# EAGLE board DC30_Cnet_Cow-A-Bunga_SAO Panel (EAGLE 9.6.2)
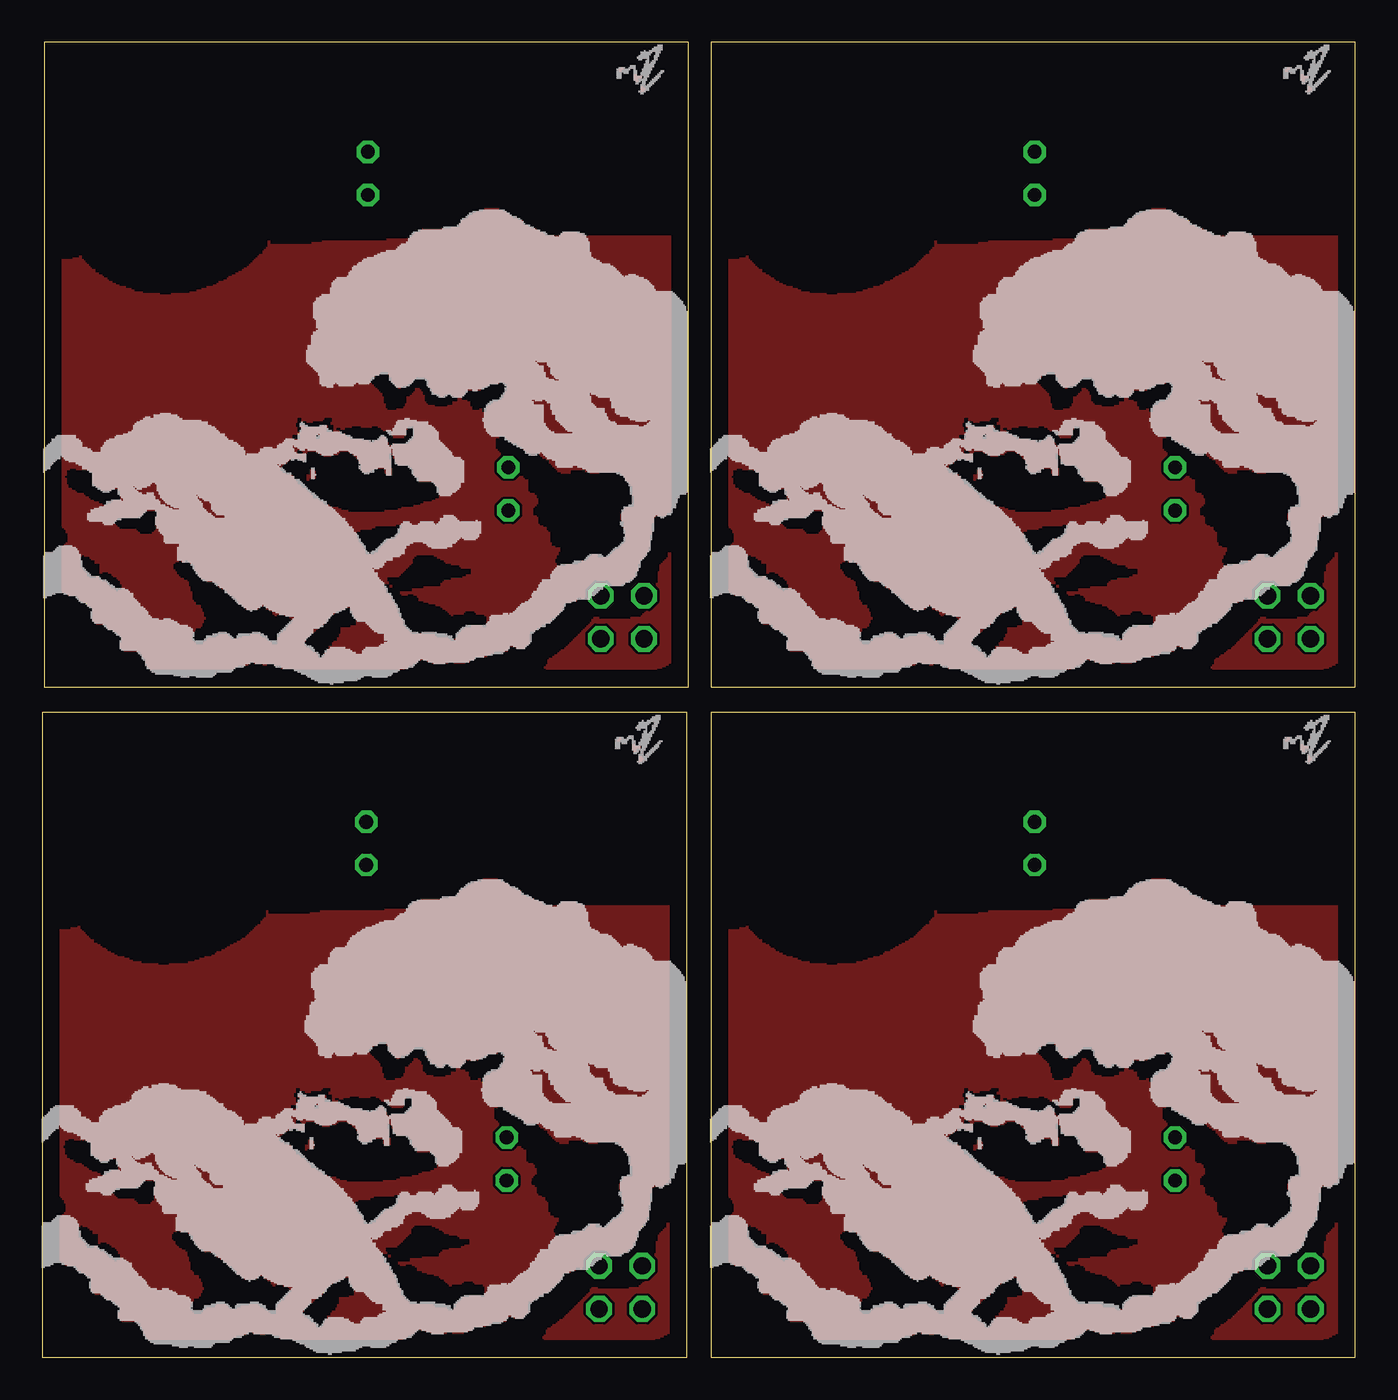
[diagram p0: board, top side]
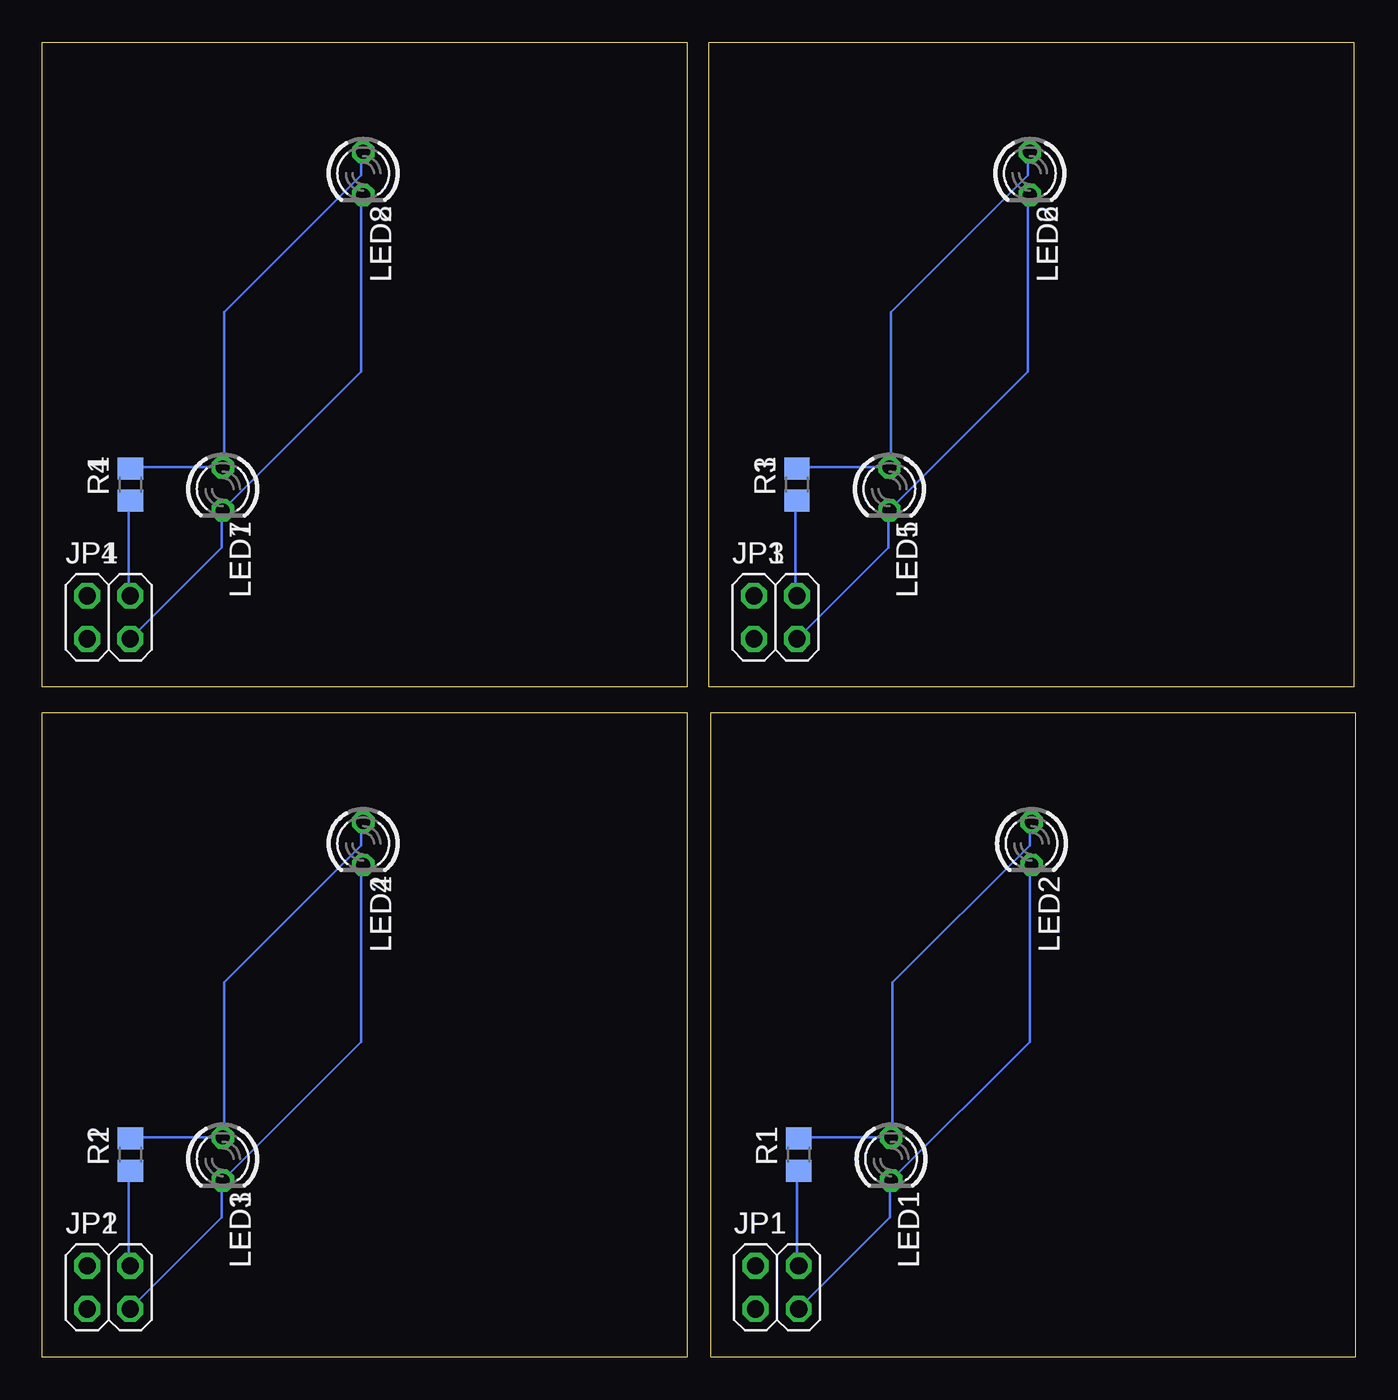
[diagram p1: board, bottom side, seen from below]

Size 77.4 x 77.5 mm. Coordinates in mm from the lower left corner, seen from the top.
Outline: 0,0 38,0 38,38 0,38 0,0
Outline: 39.4,0 77.4,0 77.4,38 39.4,38 39.4,0
Outline: 0.1,39.5 38.1,39.5 38.1,77.5 0.1,77.5 0.1,39.5
Outline: 39.4,39.5 77.4,39.5 77.4,77.5 39.4,77.5 39.4,39.5
Copper layers (1*16): Top 0.035mm / dielectric 1.5mm / Bottom 0.035mm
Design rules "default": minimum track width 6mil, minimum drill 0.35mm, track to track 6mil, track to pad 6mil, pad to pad 6mil, via to via 6mil, smd to smd 6mil, copper to edge 40mil, drill to drill 6mil, minimum pad ring 10mil, minimum via ring 8mil, stop-mask expansion 4mil, vias tented up to drill 0mil, thermal gap 10mil
tRestrict: area 16.5,10.7 to 17.2,10.8; area 16.5,10.8 to 17.5,11; area 16.2,10.9 to 18.6,11; area 16.1,11 to 19.4,11.2; area 15.8,11.2 to 19.8,11.3; area 15.8,11.2 to 17.3,11.3; area 17.6,11.2 to 20.1,11.3; area 15.8,11.3 to 17.2,11.5; area 17.6,11.3 to 20.2,11.5; area 15.7,11.4 to 17.2,11.5; area 17.8,11.4 to 20.6,11.5; area 15.5,11.5 to 17.1,11.7; 5028 more areas
bRestrict: area 16.5,10.7 to 17.2,10.8; area 16.5,10.8 to 17.5,11; area 16.2,10.9 to 18.6,11; area 16.1,11 to 19.4,11.2; area 15.8,11.2 to 19.8,11.3; area 15.8,11.2 to 17.3,11.3; area 17.6,11.2 to 20.1,11.3; area 15.8,11.3 to 17.2,11.5; area 17.6,11.3 to 20.2,11.5; area 15.7,11.4 to 17.2,11.5; area 17.8,11.4 to 20.6,11.5; area 15.5,11.5 to 17.1,11.7; 796 more areas

## Footprints (pad centres in the part's own frame; a part is rotated, then mirrored left to right if it is on the bottom)
2X02 = drill 1.016 octagon: 1 -1.27,-1.27; 2 -1.27,1.27; 3 1.27,-1.27; 4 1.27,1.27
LED3MM = drill 0.813 octagon: A -1.27,0; K 1.27,0
R0805 = smd 1.3 x 1.5: 1 -0.95,0; 2 0.95,0

## Placement (x,y rotation side)
JP1  [2X02]  34.09,4.11 0 bottom
JP2  [2X02]  73.49,4.11 0 bottom
JP3  [2X02]  34.19,43.61 0 bottom
JP4  [2X02]  73.49,43.61 0 bottom
LED1  [LED3MM]  27.37,11.68 270 bottom
LED2  [LED3MM]  19.09,30.28 270 bottom
LED3  [LED3MM]  66.77,11.68 270 bottom
LED4  [LED3MM]  58.49,30.28 270 bottom
LED5  [LED3MM]  27.47,51.18 270 bottom
LED6  [LED3MM]  19.19,69.78 270 bottom
LED7  [LED3MM]  66.77,51.18 270 bottom
LED8  [LED3MM]  58.49,69.78 270 bottom
R1  [R0805]  32.82,11.94 90 bottom
R2  [R0805]  72.22,11.94 90 bottom
R3  [R0805]  32.92,51.44 90 bottom
R4  [R0805]  72.22,51.44 90 bottom

## Library data of the parts
JP1-JP4 = pinhead
LED1-LED8 = led
R1-R4 = rcl; SPICEPREFIX: R

## Nets
N$1: JP1.3 LED1.K LED2.K
N$2: JP1.4 R1.1
N$3: JP2.3 LED3.K LED4.K
N$4: LED1.A LED2.A R1.2
N$5: LED3.A LED4.A R2.2
N$6: JP2.4 R2.1
N$7: JP3.3 LED5.K LED6.K
N$8: LED5.A LED6.A R3.2
N$9: JP3.4 R3.1
N$10: JP4.3 LED7.K LED8.K
N$11: LED7.A LED8.A R4.2
N$12: JP4.4 R4.1

## Tracks (layer width: path | path; a pad name or v marks a point on that pad's centre or on a via)
GND
  pour Top: 0,0 0,38 38,38 38,0
GND1
  pour Top: 39.4,0 39.4,38 77.4,38 77.4,0
GND2
  pour Top: 0.1,39.5 0.1,77.5 38.1,77.5 38.1,39.5
GND3
  pour Top: 39.4,39.5 39.4,77.5 77.4,77.5 77.4,39.5
N$1
  Bottom 0.152: JP1.3 32.77,2.9 27.43,8.23 27.43,10.36 LED1.K 27.28,10.52 19.2,18.59 19.2,28.96 LED2.K
N$2
  Bottom 0.152: R1.1 32.92,10.97 32.92,5.49 JP1.4
N$3
  Bottom 0.152: JP2.3 72.17,2.9 66.83,8.23 66.83,10.36 LED3.K 66.68,10.52 58.6,18.59 58.6,28.96 LED4.K
N$4
  Bottom 0.152: R1.2 32.77,12.95 27.43,12.95 LED1.A 27.28,12.95 27.28,22.1 19.2,30.18 19.2,31.55 LED2.A
N$5
  Bottom 0.152: R2.2 72.17,12.95 66.83,12.95 LED3.A 66.68,12.95 66.68,22.1 58.6,30.18 58.6,31.55 LED4.A
N$6
  Bottom 0.152: R2.1 72.32,10.97 72.32,5.49 JP2.4
N$7
  Bottom 0.152: JP3.3 32.87,42.4 27.53,47.73 27.53,49.86 LED5.K 27.38,50.02 19.3,58.09 19.3,68.46 LED6.K
N$8
  Bottom 0.152: R3.2 32.87,52.45 27.53,52.45 LED5.A 27.38,52.45 27.38,61.6 19.3,69.67 19.3,71.05 LED6.A
N$9
  Bottom 0.152: R3.1 33.02,50.47 33.02,44.99 JP3.4
N$10
  Bottom 0.152: JP4.3 72.17,42.4 66.83,47.73 66.83,49.86 LED7.K 66.68,50.02 58.6,58.09 58.6,68.46 LED8.K
N$11
  Bottom 0.152: R4.2 72.17,52.45 66.83,52.45 LED7.A 66.68,52.45 66.68,61.6 58.6,69.67 58.6,71.05 LED8.A
N$12
  Bottom 0.152: R4.1 72.32,50.47 72.32,44.99 JP4.4

## Text on the board
_bNames: LED2 | LED2 | R1 | R1 | LED1 | LED1 | JP1 | JP1 | LED2 | LED2 | R1 | R1 | LED1 | LED1 | JP1 | JP1